# Altium PCB PALHASERVO.PcbDoc
Units mm, origin at the board's own origin, x right, y up, seen from the top; angles counter-clockwise.
Board outline 16.5 x 31 mm, 2 copper layers (Top Layer, Bottom Layer), stack 1.671 mm thick; 20 components, 17 nets, 72 pads, 0 vias.
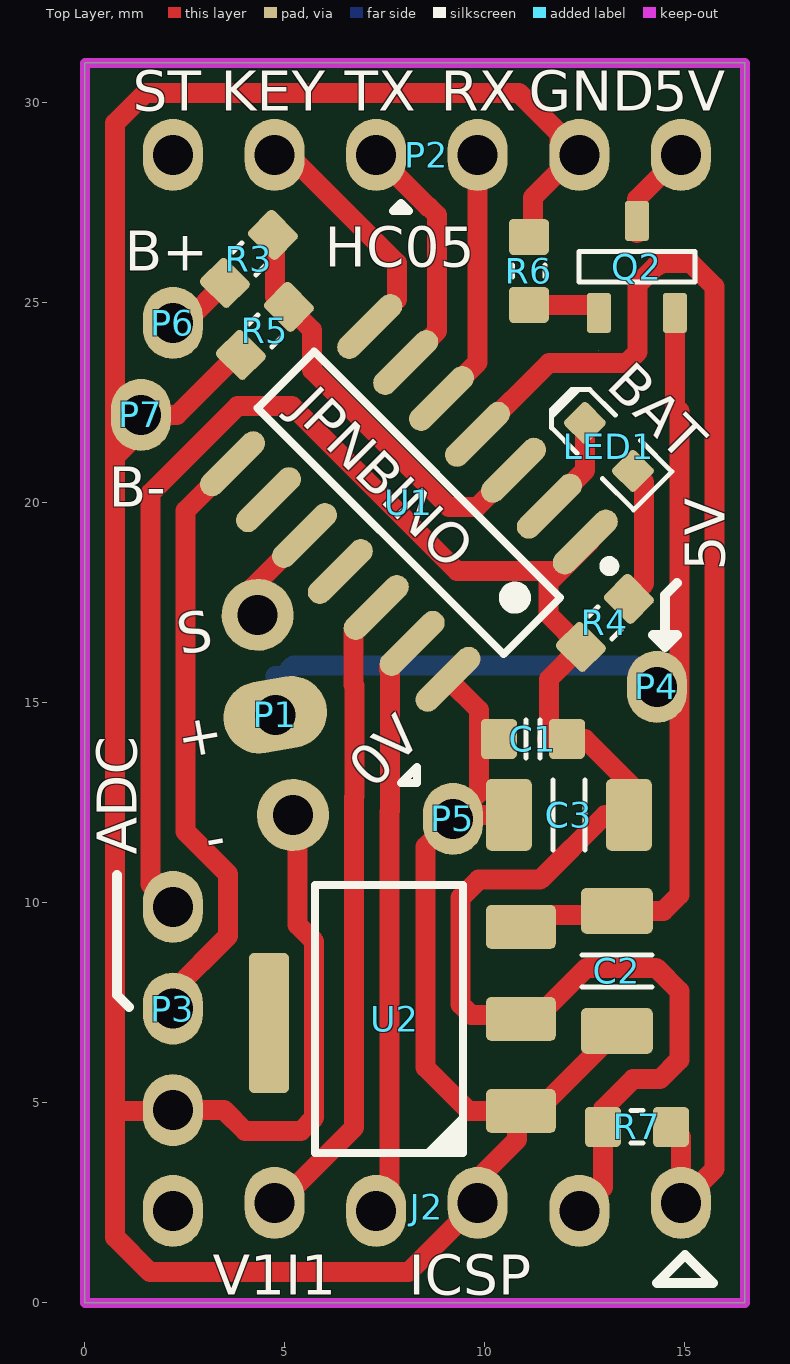
[diagram p0: Top Layer view]
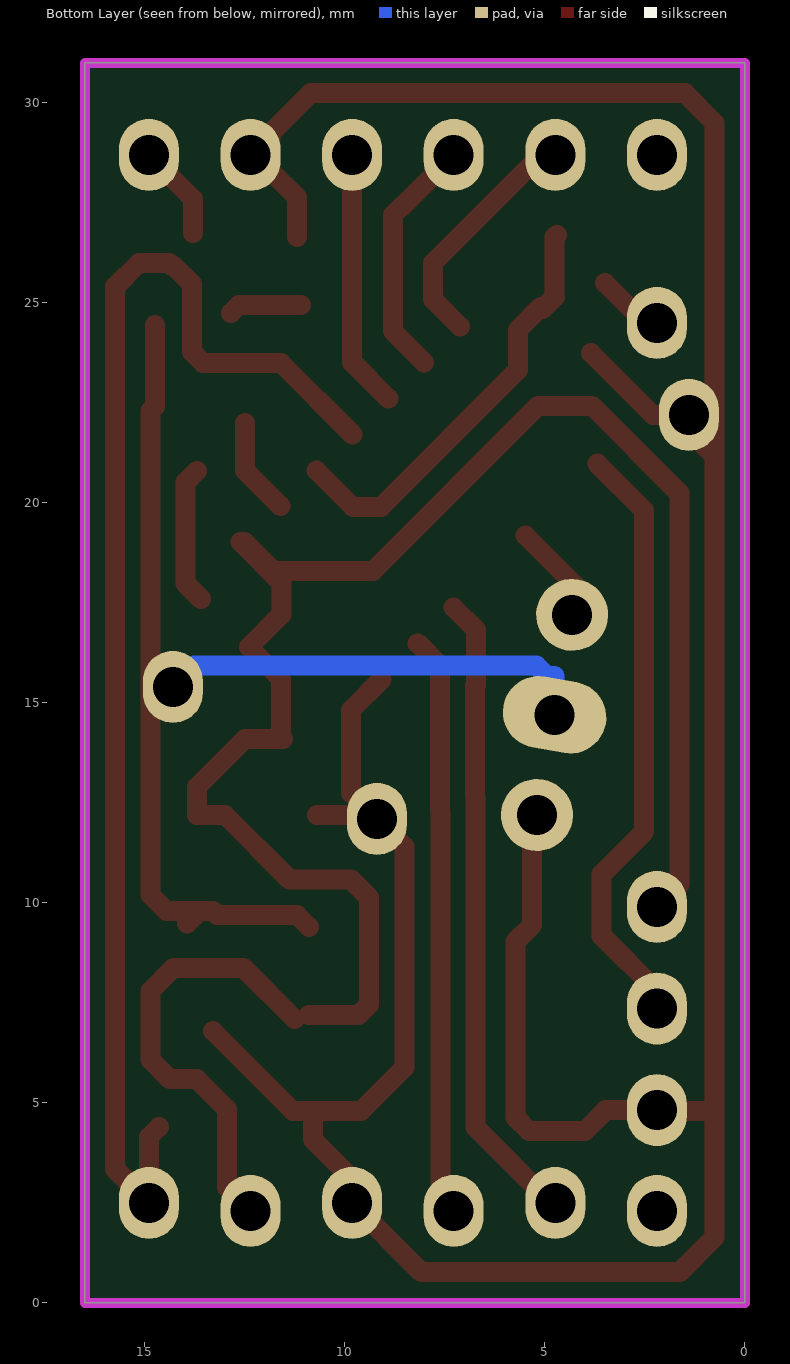
[diagram p1: Bottom Layer view, seen from below]

## Layer stack, top to bottom
Top Solder: solder mask 0.0102, Solder Resist, Dk 3.5
Top Layer: signal copper 0.0356
Dielectric1: dielectric 1.6, FR-4, Dk 4.8
Bottom Layer: signal copper 0.0356
Bottom Solder: solder mask 0.0102, Solder Resist, Dk 3.5

## Board outline
0,0 0,31 16.5,31 16.5,0

## Design rules (kind name [scope] priority, off if disabled: settings)
Clearance [All] p1: gap=0.381
PolygonConnect [All] p1: connectstyle=Relief reliefconductorwidth=0.254 reliefentries=4 polygonreliefangle="90 Angle" airgapwidth=0.254
RoutingVias [All] p1: holewidth=0.711 width=1.27 viastyle="Through Hole" minholewidth=0.711 minwidth=1.27 maxholewidth=0.711 maxwidth=1.27
SilkToSolderMaskClearance SilkscreenOverComponentPads [IsPad] p1: minsilkscreentomaskgap=0.254 clearancetoexposedcopper=TRUE
SolderMaskExpansion [All] p1: expansion=0.102
Width [All] p1: maxlimit=1 minlimit=0.5 preferedwidth=0.5
29 further rules are at their usual default settings.

## Components (designator, comment, footprint, x,y, rotation, side; value= is the part's Value field where it differs from the comment)
C1 "approved sub OK" CAPC1608X90N 11.2,14.1 r0 top
C2 "approved sub OK" CAPC3216X180N 13.3,8.3 r270 top
C3 "approved sub OK" CAPC3216X180N 12.1,12.2 r180 top
J2 "pickit3" CONN_ICSP 14.9,2.5 r180 top
LED1 "RED" LED-0603-RED 13.1,21.4 r135 top
P1 "3" "PAD_PTH 3 vias"#1 5.2,12.2 r100 top
P2 "6" "PAD_PTH 6 VIAS" 14.9,28.7 r180 top
P3 "3" "PAD_PTH 3 vias"#2 2.2,9.9 r270 top
P4 "1" PAD_PTH 14.3,15.4 r0 top
P5 "1" PAD_PTH 9.2,12.1 r0 top
P6 "1" PAD_PTH 2.2,24.5 r180 top
P7 "1" PAD_PTH 1.4,22.2 r0 top
Q2 "BSS123" SOT23-3 13.8,25.9 r90 top
R3 "Thick Film" RESC1608X55N 4.1,26.1 r45 top
R4 "Thick Film" RESC1608X55N 13,17 r45 top
R5 "Thick Film" RESC1608X55N 4.5,24.3 r225 top
R6 "Thick Film" RESC1608X55N 11.1,25.8 r90 top
R7 "Thick Film" RESC1608X55N 13.8,4.4 r0 top
U1 "PIC16LF1824-I/SL" MCHP-SOIC-SL14_N 8.1,20 r225 top
U2 "3V3, 1A" SOT223 7.6,7.1 r180 top

## Footprints (in the part's own frame and the unit in brackets; to place one, negate y for a bottom-side part, rotate by r counter-clockwise, add the part's x,y. Pads: shape width x height; smd on the part's side, far side on the other; paste and mask are expansions set on the pad)
CAPC1608X90N [mm] "Chip Capacitor, Body 1.6x0.8mm, EIA 0603, IPC Medium Density"
  round 0.254 on Mech15: 0(0,0)
  rrect25% 0.9x1 smd: 1(-0.85,0) 2(0.85,0)
  Top Layer pour cut-out: -0.6,0.5 -0.4,0.7 0.4,0.7 0.6,0.5 0.6,-0.5 0.4,-0.7 -0.4,-0.7 -0.6,-0.5
  silkscreen extent -0.18,-0.48 0.18,0.48, body extent -0.85,-0.45 0.85,0.45, height 0.89
CAPC3216X180N [mm] "Chip Capacitor, Body 3.2x1.6mm, 1.8mm H, EIA 1206, IPC Medium Density"
  round 0.508 on Mech15: 0(0,0)
  rrect25% 1.15x1.8 smd: 1(-1.5,0) 2(1.5,0)
  silkscreen extent -0.4,-0.88 0.4,0.88, body extent -1.7,-0.9 1.7,0.9, height 1.8
CONN_ICSP [mm] "ICSP CONNECTOR FOR PICKIT3  PITCH2.54MM"
  oval 1.5x1.8 hole 1: 1(0,0) 2(2.54,0.2) 3(5.08,0) 4(7.62,0.2) 5(10.16,0) 6(12.7,0.2)
LED-0603-RED [mm]
  round 0.254 on Mech15: 0(0,0)
  rrect25% 0.8x0.8 smd: A(-0.85,0) K(0.85,0)
  Top Layer pour cut-out: -0.5,0.5 0.5,0.5 0.5,-0.5 -0.5,-0.5
  silkscreen extent -1.55,-0.68 1.68,0.68, body extent -0.8,-0.4 0.8,0.4, height 0.75
MCHP-SOIC-SL14_N [mm] "SOIC, 14-Leads, Body 8.65x3.9mm, Pitch 1.27mm, IPC Medium Density"
  oval 2.05x0.6 smd: 1(-2.425,3.81) 2(-2.425,2.54) 3(-2.425,1.27) 4(-2.425,0) 5(-2.425,-1.27) 6(-2.425,-2.54) 7(-2.425,-3.81) 8(2.425,-3.81) 9(2.425,-2.54) 10(2.425,-1.27) 11(2.425,0) 12(2.425,1.27) 13(2.425,2.54) 14(2.425,3.81)
  silkscreen extent -2.55,-4.35 1,4.78, body extent -3,-4.38 3,4.37, height 1.75
PAD_PTH [mm] "1mm hole pad"
  oval 1.5x1.8 hole 1: 1(0,0)
"PAD_PTH 3 vias"#1 [mm] "1mm hole pad 3vias pitch 2.54mm"
  round 1.8 hole 1: 1(0,0) 3(5.08,0)
  oval 1.8x2.6 hole 1: 2(2.54,0)
"PAD_PTH 3 vias"#2 [mm] "1mm hole pad 3vias pitch 2.54mm"
  oval 1.8x1.5 hole 1: 1(0,0) 2(2.54,0) 3(5.08,0)
"PAD_PTH 6 VIAS" [mm] "1mm hole pad 6 vias pitch 2.54mm"
  oval 1.5x1.8 hole 1: 1(0,0) 2(2.54,0) 3(5.08,0) 4(7.62,0) 5(10.16,0) 6(12.7,0)
RESC1608X55N [mm] "Chip Resistor, Body 1.6x0.8mm, EIA 0603, IPC Medium Density"
  round 0.254 on Mech15: 0(0,0)
  rrect25% 0.9x1 smd: 1(-0.85,0) 2(0.85,0)
  Top Layer pour cut-out: -0.6,0.5 -0.4,0.7 0.4,0.7 0.6,0.5 0.6,-0.5 0.4,-0.7 -0.4,-0.7 -0.6,-0.5
  silkscreen extent -0.15,-0.41 0.15,0.41, body extent -0.87,-0.47 0.88,0.48, height 0.54
SOT23-3 [mm] "SOT23, 3 pin"
  round 0.5 on Mech15: 0(0,0)
  rrect25% 1x0.6 smd: 1(-1.15,0.95) 2(-1.15,-0.95) 3(1.15,0)
  silkscreen extent -0.38,-1.45 0.38,1.45, body extent -1.4,-1.45 1.4,1.45, height 1.29
SOT223 [mm] "SOT223 /SC-73"
  round 1 on Mech15: 0(0,0)
  rrect25% 1.75x1.1 smd: 1(-3.3,2.3) 2(-3.3,0) 3(-3.3,-2.3)
  rrect25% 1x3.5 smd: 4(3,0.1)
  silkscreen extent -1.85,-3.35 1.85,3.35, body extent -3.65,-3.35 3.65,3.35, height 1.8

## Part data
C1: library part CAPC_100n_0603_X7R_50V_10%, "Capacitor SMD Cer 100nF 10% 50V X7R 0603"
C2 C3: library part CAPC_10u_1206_25V, "Capacitor SMD Cer 10uF 10% 25V X7R 1206"
J2: library part "CONN PROG PICKIT3", "CONN PROG PICKIT3 6VIAS"
LED1: library part "LED RED CLEAR 0603 SMD", "LED RED CLEAR 0603 SMD"
P1 P3: library part "PAD PTH 3 VIAS HOLE 1MM", "PAD PTH 3 VIAS HOLE 1MM PITCH2.54MM"
P2: library part "PAD PTH 6 VIAS HOLE 1MM", "PAD PTH 6 VIAS HOLE 1MM PITCH2.54MM"
P4 P5 P6 P7: library part "PAD PTH 1 VIA HOLE 1MM", "PAD PTH 1 VIA HOLE 1MM"
Q2: library part MOSFET_BSS123, "MOSFET SMD N-CH 100V 170mA SOT23-3"
R3 R5 R6 R7: library part RES_10K_0603_5%, "Resistor SMD chip 10k Ohm 0.1W 5% 0603"
R4: library part RES_1K_0603_5%, "Resistor SMD chip 1k Ohm 0.1W 5% 0603"
U1: "Flash Microcontroller with XLP Technology, 32 MHz, 11 I/O, -40 to 85 degC, 14-pin SOIC (SL14), Tube"
U2: library part "REG AZ1117CR-33", "IC REG LDO 3.3V 1A SOT223"

## Nets (pads, with @x,y where several pads share a name; then routed paths per layer and width w, separated by ;. In a path a pad name is that pad's centre, name@x,y a point inside that pad or via, vN(x,y) a via of type N, cw(c..) or ccw(c..) an arc to the next point about the centre after c; other vN are vias at no path point)
ADC_POT: P3.2 U1.8 | length 15.1
  Top Layer w0.5: P3.2 2.2,7.797 3.581,9.178 3.581,10.719 2.52,11.78 2.52,19.808 U1.8
GND: C1.1 C2.2 C3.2 J2.3 P1.1 P2.2 P3.3 P5.1 P7.1 R5.2 R6.2 U1.14 U2.1 | length 91
  Top Layer w0.5: 0.758,21.1 0.758,4.8 ; P7.1 P7.1@1.8,22.2 ; R5.2@3.85,23.75 2.3,22.2 P7.1@1.8,22.2 ; P1.1 5.319,12.081 5.319,9.45 5.731,9.038 5.731,4.631 5.4,4.3 4,4.3 3.48,4.82 P3.3 2.18,4.8 0.758,4.8 ; U1.14 9.85,14.821 9.85,12.75 P5.1@9.45,12.35 ; C3.2@10.7,12.2 9.6,12.2 P5.1@9.45,12.35 ; R6.2@11.2,26.65 11.2,27.64 11.86,28.3 11.86,29.24 10.858,30.242 1.5,30.242 0.758,29.5 0.758,21.158 P7.1@1.8,22.2 ; C2.2 11.3,4.8 U2.1@10.8,4.8 ; 0.758,4.8 0.758,1.639 1.628,0.769 8.089,0.769 J2.3 9.82,3.1 10.8,4.08 U2.1@10.8,4.8 ; P5.1@9.45,12.35 P5.1 8.513,11.413 8.513,5.887 9.6,4.8 U2.1@10.8,4.8
HC_05_KEY: P2.5 U1.7 | length 6.1
  Top Layer w0.5: P2.5 5.1,28.7 7.8,26 7.8,25.088 U1.7
HC_05_POWER_ON: Q2.1 R6.1 | length 1.8
  Top Layer w0.5: R6.1 12.65,24.95 Q2.1
HC_05_VCC5V0: P2.1 Q2.3 | length 2.4
  Top Layer w0.5: Q2.3@13.8,26.75 13.8,27.6 P2.1
ICSPCLK: J2.5 U1.12 | length 16
  Top Layer w0.5: J2.5 4.846,2.5 6.731,4.385 6.731,12.653 6.743,12.665 6.743,15.43 6.719,15.454 6.719,16.823 U1.12
ICSPDAT: J2.4 U1.13 | length 14.6
  Top Layer w0.5: J2.4 7.612,2.632 7.612,12.288 7.624,12.3 7.624,15.795 7.6,15.819 7.6,15.908 U1.13
LED_LOW_BATT: LED1.K U1.2 | length 2.5
  Top Layer w0.5: U1.2 12.499,20.807 LED1.K
M\C\L\R\: J2.1 R7.2 U1.4 | length 34.2
  Top Layer w0.5: U1.4 11.6,23.5 13.548,23.5 13.819,23.771 13.819,25.467 14.271,25.919 14.317,25.919 14.398,26 15.148,26 15.742,25.406 15.742,3.342 J2.1 14.9,4.15 R7.2
MCU_RX: P2.3 U1.5 | length 6.5
  Top Layer w0.5: U1.5 9.82,23.516 P2.3
MCU_TX: P2.4 U1.6 | length 6.2
  Top Layer w0.5: P2.4 8.58,27.4 8.6,27.4 8.8,27.2 8.8,24.292 U1.6
NetLED1_A: LED1.A R4.2 | length 3.5
  Top Layer w0.5: R4.2 13.98,17.98 13.98,20.52 LED1.A
SERVO_PWM: P1.3 U1.10 | length 2.6
  Top Layer w0.5: P1.3@4.1,17.08 P1.3@4.1,17.18 ; P1.3@4.2,17.18 4.2,17.896 U1.10
V_BAT: P6.1 R3.1 | length 1.7
  Top Layer w0.5: P6.1 2.5,24.5 R3.1
V_BAT_ADC: R3.2 R5.1 U1.3 | length 10.7
  Top Layer w0.5: R3.2 4.755,26.647 4.755,25.156 4.751,25.151 R5.1@5.051,24.851 ; R5.1 5.677,24.325 5.677,23.323 9.1,19.9 9.8,19.9 10.713,20.813 U1.3
VCC3V3: C1.2 C3.1 J2.2 P3.1 R4.1 R7.1 U1.1 U2.2 | length 54.4
  Top Layer w0.5: P3.1 1.639,10.461 1.639,20.244 3.818,22.423 5.177,22.423 9.3,18.3 11.788,18.3 U1.1 ; U2.2@10.9,7.2 9.655,7.2 9.394,7.461 9.394,10.131 9.844,10.581 11.3,10.581 ; U2.2@11.261,7.1 12.539,8.378 14.283,8.378 14.861,7.8 14.861,6.078 14.377,5.594 13.7,5.594 12.95,4.844 R7.1 12.95,2.89 J2.2 ; 11.381,10.581 13,12.2 13.7,12.2 13.7,12.9 12.5,14.1 C1.2 11.55,14.1 11.6,14.15 11.6,15.6 R4.1 11.588,17.21 11.588,18 U1.1@12.609,19.021
VCC5V0: C2.1 P1.2 P4.1 Q2.2 U2.3 | length 29.8
  Top Layer w0.5: U2.3 11.2,9.7 13.2,9.7 C2.1 14.461,9.8 14.861,10.2 14.861,22.3 14.75,22.411 Q2.2@14.75,24.45 ; C2.1@13.668,9.769 C2.1@13.95,9.487
  Bottom Layer w0.5: P1.2 4.759,15.672 4.952,15.672 5.211,15.931 13.769,15.931 P4.1
pads on no net: C1.0 C2.0 C3.0 J2.6 LED1.0 P2.6 Q2.0 R3.0 R4.0 R5.0 R6.0 R7.0 U1.9 U1.11 U2.0 U2.4

## Keep-outs
Keep-Out Layer:
  the board outline again, w0.254

## Silkscreen, mask and mechanical layers (free items; w line width, h text height)
Top Overlay:
  lines w0.2: 7.7,27.3 8.1,27.3 7.9,27.5 7.7,27.3 ; 7.9,13 8.3,13 8.3,13.4 7.9,13
  lines w0.254: 0.8,10.7 0.8,7.7 1.1,7.4 ; 14.4,16.7 14.8,16.7 14.5,16.4 ; 14.6,16.7 14.2,16.7 14.5,16.4 ; 14.8,18 14.5,17.7 14.5,16.4 ; 14.5,16.4 14.5,16.4 ; 14.3,0.5 15.7,0.5 15,1.2 14.3,0.5
  text "ST" at 1.2,29.8 h1
  text "KEY" at 3.4,29.8 h1
  text "TX" at 6.5,29.8 h1
  text "RX" at 8.9,29.8 h1
  text "GND" at 11.1,29.8 h1
  text "5V" at 14.2,29.8 h1
  text "HC05" at 6,25.9 h1
  text "B+" at 1,25.8 h1
  text "BAT" at 13,22.9 h1 r315
  text "JPNBINO" at 5.1,22.3 h1 r315
  text "B-" at 0.6,19.9 h1
  text "5V" at 16,18.3 h1 r90
  text "S" at 2.4,16.2 h1 r10
  text "+" at 2.4,13.6 h1 r10
  text "0V" at 7.2,12.8 h1 r45
  text "ADC" at 1.3,11.2 h1 r90
  text "-" at 3.1,11.1 h1 r10
  text "V1I1" at 3.2,0.2 h1
  text "ICSP" at 8.1,0.2 h1